# Altium PCB myy.PcbDoc
Units mil, origin at the board's own origin, x right, y up, seen from the top; angles counter-clockwise.
Board outline 3655 x 3985 mil, 2 copper layers (Top Layer, Bottom Layer); 77 components, 66 nets, 230 pads, 10 vias.
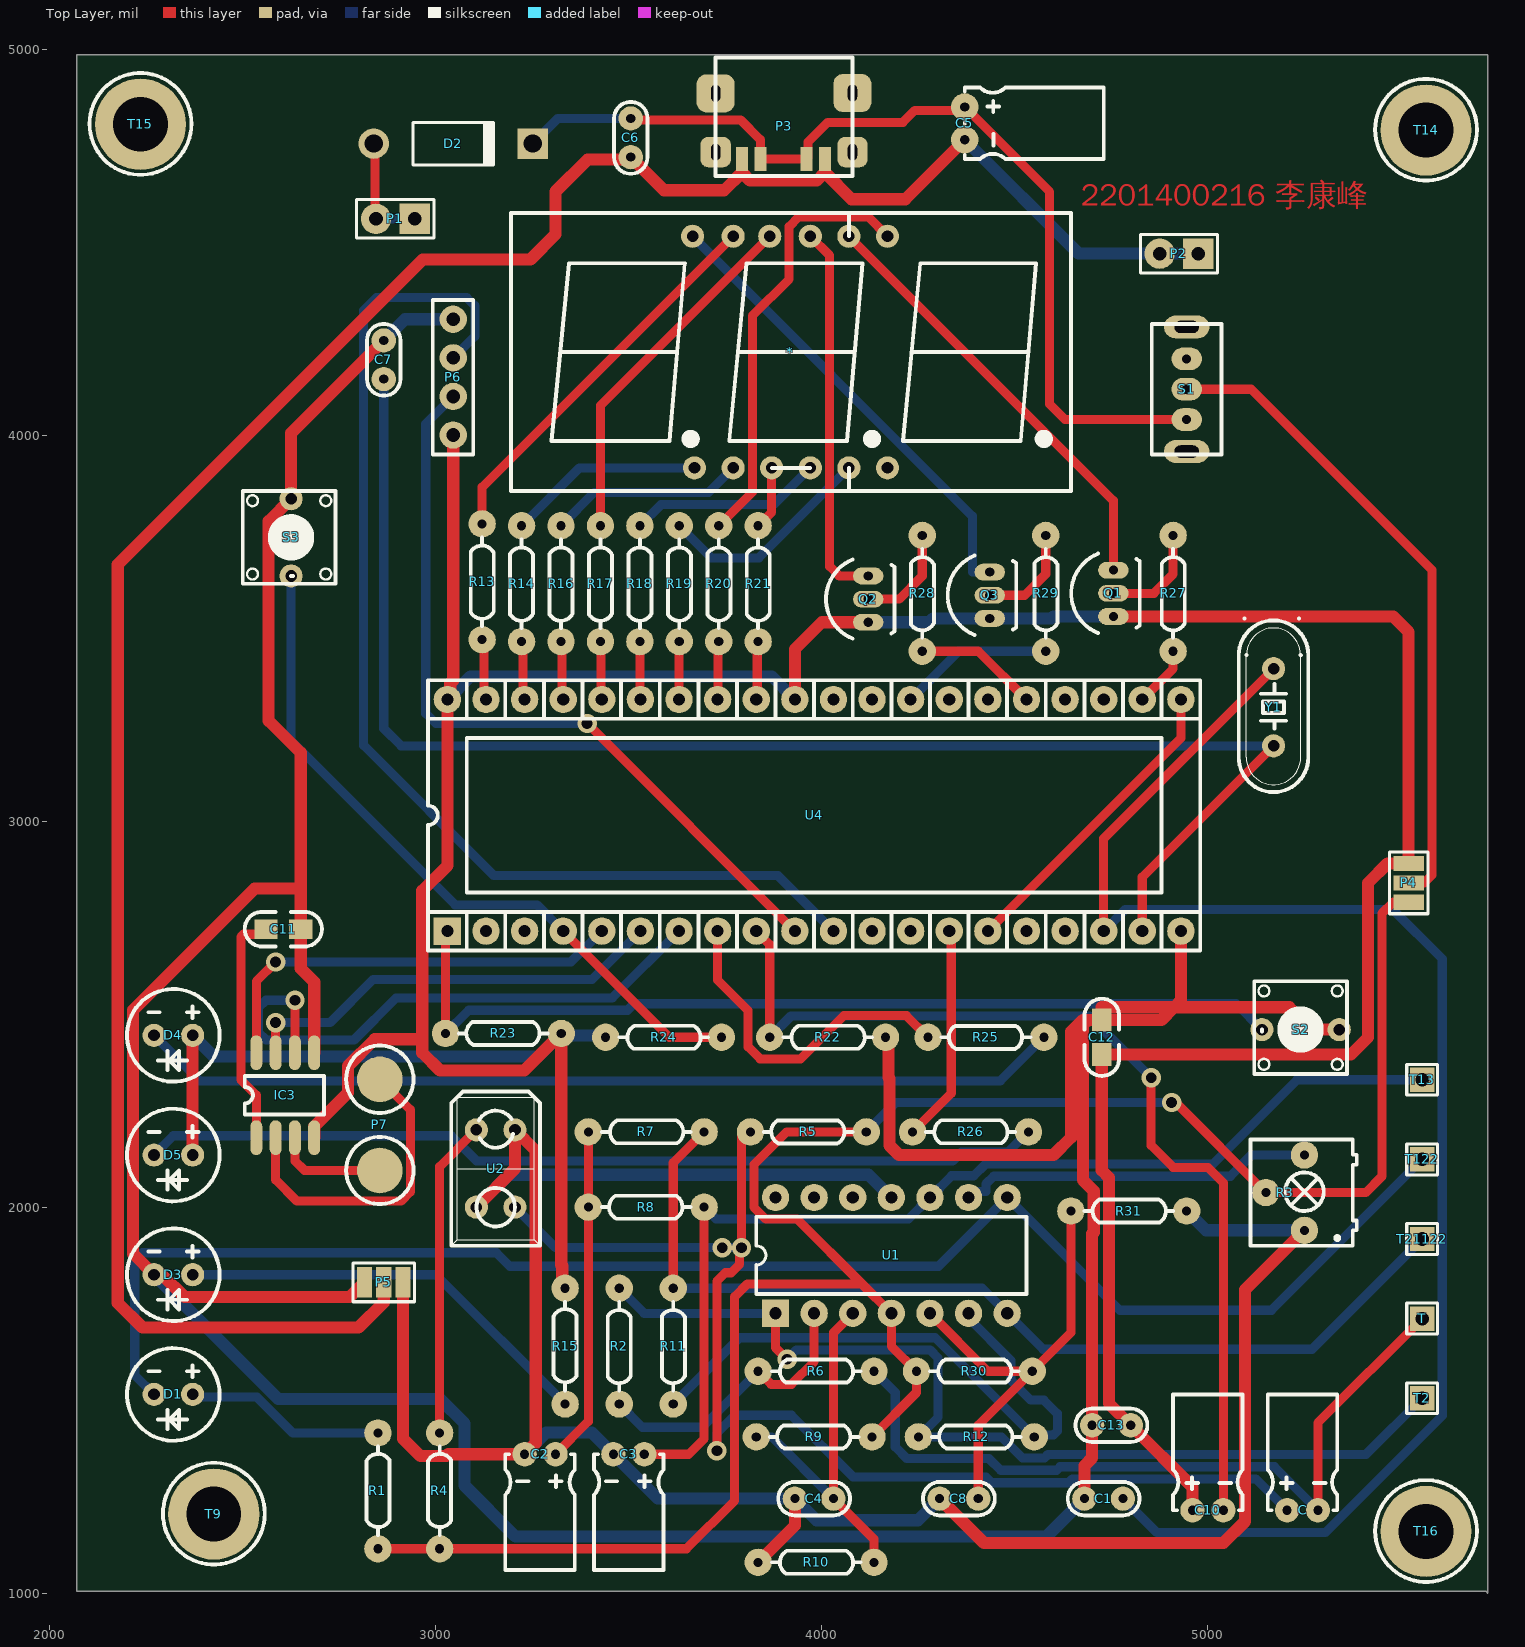
[diagram p0: Top Layer view]
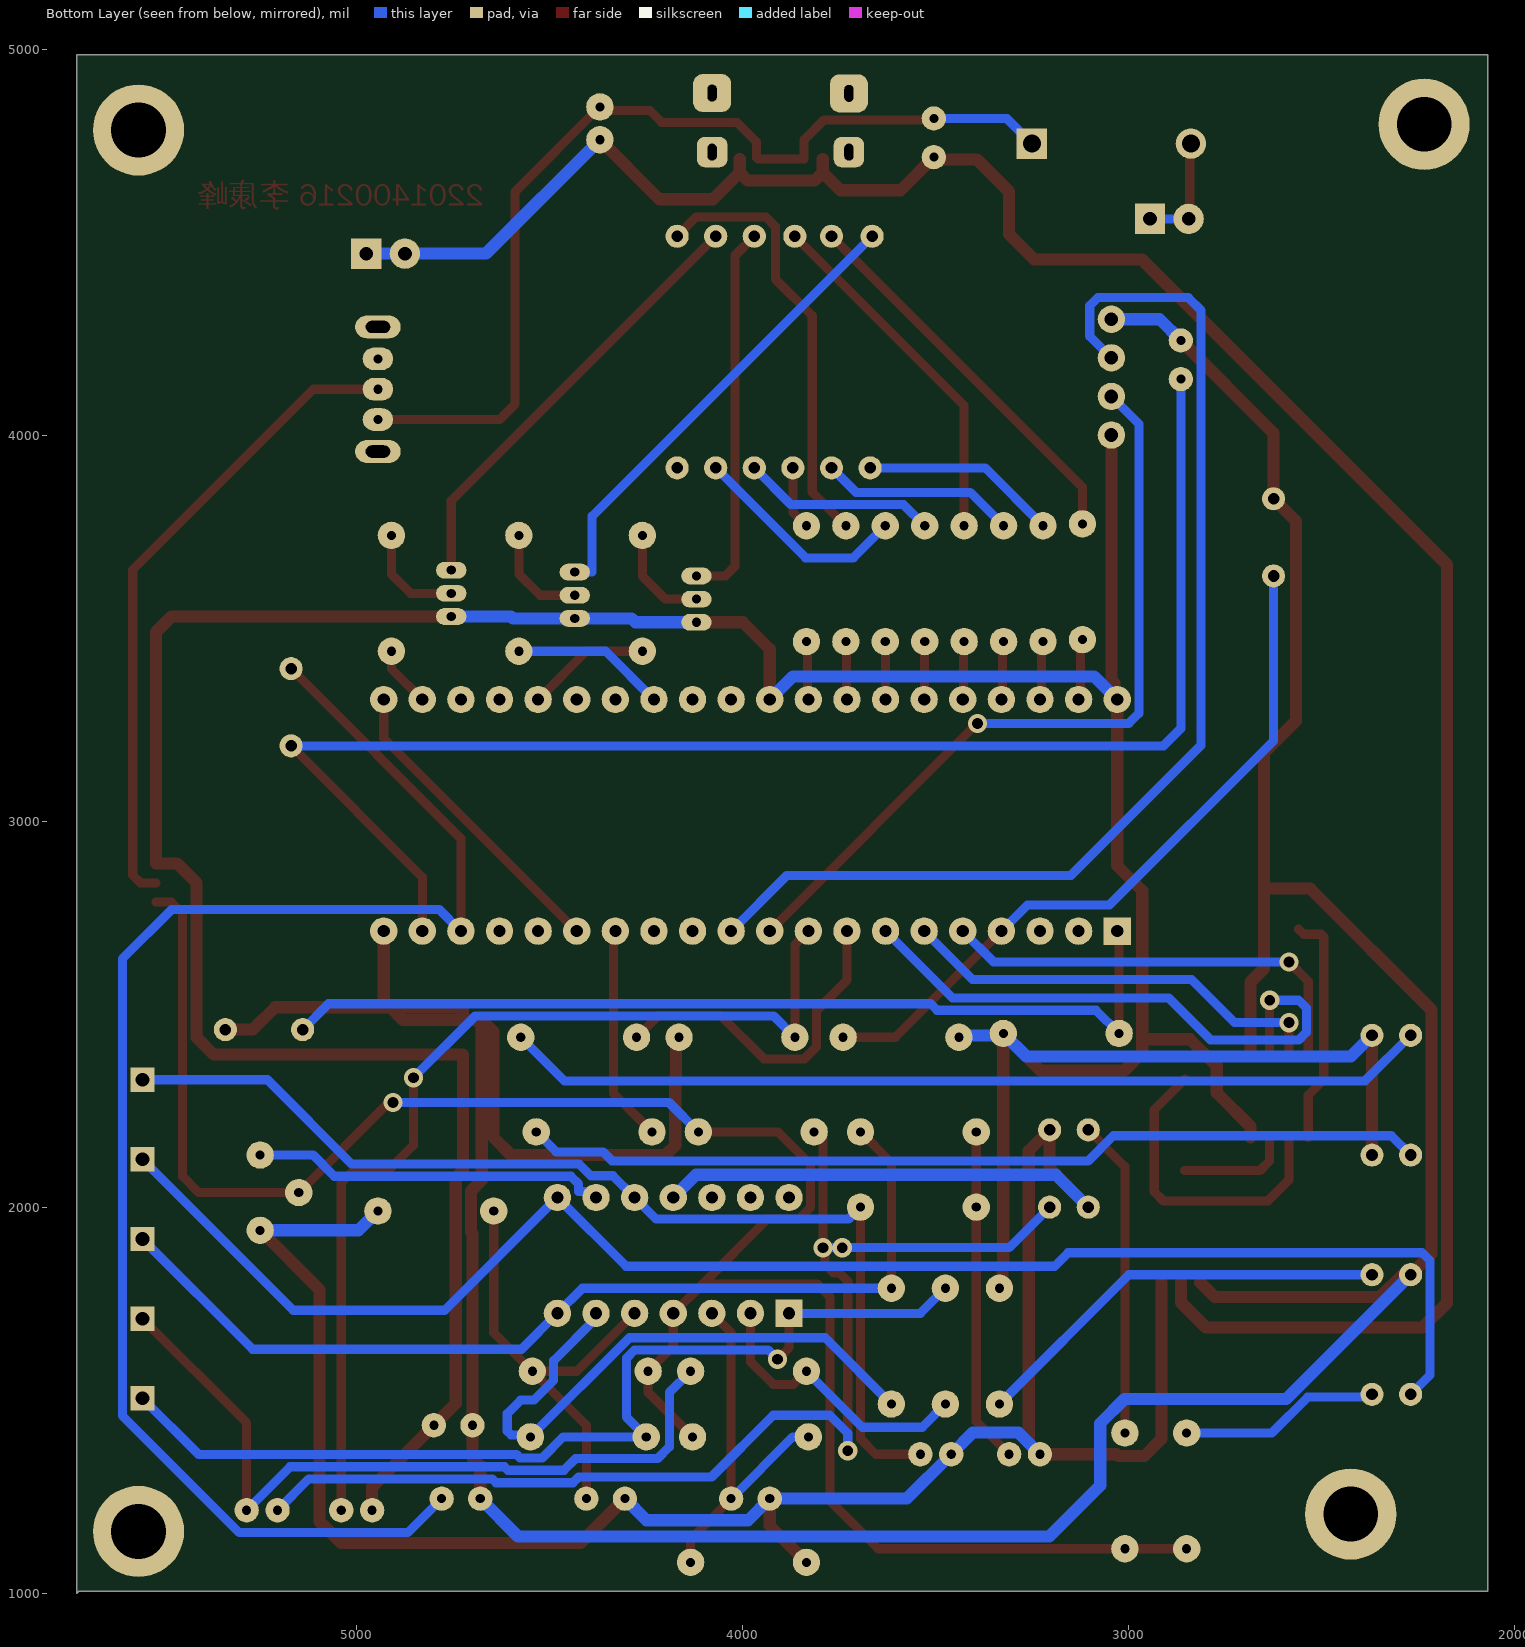
[diagram p1: Bottom Layer view, seen from below]

## Layer stack, top to bottom
Top Solder: solder mask 0.4, Solder Resist, Dk 3.5
Top Layer: signal copper 1.4
Dielectric 1: dielectric 12.6, FR-4, Dk 4.8
Bottom Layer: signal copper 1.4
Bottom Solder: solder mask 0.4, Solder Resist, Dk 3.5

## Board outline
2070,1005 2070,4985 5725,4985 5725,1000 5720,1005

## Design rules (kind name [scope] priority, off if disabled: settings)
Clearance [All] p1: gap=7.87 ignorepadtopadclearanceinfootprint=TRUE
HoleSize [All] p1: absolutevalues=TRUE maxlimit=300 minlimit=1 maxpercent=80.000 minpercent=20.000
HoleToHoleClearance [All] p1: gap=0.79 allowstackedmicrovias=TRUE
MinimumSolderMaskSliver [All] p1: minsoldermaskwidth=0.79
PolygonConnect [All] p1: connectstyle=Relief reliefconductorwidth=10 reliefentries=4 polygonreliefangle="90 Angle" airgapwidth=10
RoutingVias [All] p1: holewidth=28 width=50 viastyle="Through Hole" minholewidth=28 minwidth=50 maxholewidth=28 maxwidth=50
SilkToSilkClearance [All] p1: silktosilkclearance=0.79
SilkToSolderMaskClearance [IsPad] p1: minsilkscreentomaskgap=0 clearancetoexposedcopper=TRUE
SolderMaskExpansion [All] p1: expansion=4
Width dgnd [InNet('DGND')] p1: maxlimit=31.5 minlimit=10 preferedwidth=31.5
Width agnd [InNet('AGND')] p2: maxlimit=31.5 minlimit=10 preferedwidth=31.5
Width gnd [InNet('GND')] p3: maxlimit=31.5 minlimit=10 preferedwidth=31.5
Width 5d [InNet('+5VD')] p4: maxlimit=31.5 minlimit=10 preferedwidth=31.5
Width 51 [InNet('+5V1')] p5: maxlimit=23.62 minlimit=10 preferedwidth=23.62
Width 5 [InNet('+5V')] p6: maxlimit=23.62 minlimit=10 preferedwidth=23.62
Width 5a [InNet('+5VA')] p7: maxlimit=23.62 minlimit=10 preferedwidth=23.62
Width 5.7V [InNet('+5.7V')] p8: maxlimit=23.62 minlimit=10 preferedwidth=23.62
Width [All] p9: maxlimit=23.62 minlimit=10 preferedwidth=23.62
25 further rules are at their usual default settings.

## Components (designator, comment, footprint, x,y, rotation, side; value= is the part's Value field where it differs from the comment)
* "tt" smg 3915,3975 r0 top
C "Cap Pol1" cd-0.1t 5205,1215 r90 top value=10uF
C1 "Cap" C-0.1 4680,1245 r0 top value=30pF
C2 "Cap Pol1" cd-0.1t 3310,1360 r270 top value=0.47uF
C3 "Cap Pol1" cd-0.1t 3540,1360 r270 top value=0.47uF
C4 "Cap" C-0.1 3930,1245 r0 top value=104
C5 "Cap Pol1" CD-0.2T 4370,4850 r0 top value=100uF
C6 "Cap" C-0.1 3505,4820 r270 top value=104
C7 "Cap" C-0.1 2865,4145 r90 top value=30pF
C8 "Cap" C-0.1 4305,1245 r0 top value=100pF
C10 "Cap Pol1" cd-0.1t 4960,1215 r90 top value=100pF
C11 "Cap" C0805R 2560,2720 r0 top value=100pF
C12 "Cap" C0805R 4725,2485 r270 top value=100pF
C13 "Cap" C-0.1 4800,1435 r180 top value=104
D1 "LED0" led5 2335,1520 r180 top
D2 "Diode 1N4007" DO-41 3045,4755 r0 top
D3 "LED0" led5 2335,1830 r180 top
D4 "LED0" led5 2335,2450 r180 top
D5 "LED0" led5 2335,2140 r180 top
IC3 "NY3P065" sop8 2625,2310 r90 top
P1 "Header 2" SIP2 2945,4560 r180 top
P2 "Header 2" SIP2 4975,4470 r180 top
P3 "Header 6" USBTYPEC6 3724.89,4733 r0 top
P4 "Header 3" JUMP3 5520,2790 r270 top
P5 "Header 3" JUMP3 2915,1805 r0 top
P6 "Header 4" SIP4 3045,4000 r90 top
P7 "Header 2" BEEP2 2855,2331.22 r270 top
Q1 "2N3906" TO92C 4755,3530 r90 top
Q2 "2N3906" TO92C 4120,3515 r90 top
Q3 "2N3906" TO92C 4435,3525 r90 top
R1 "Res2" R-0.3 2850,1415 r270 top value=1K
R2 "Res2" R-0.3 3475,1490 r90 top value=300K
R3 "RPot" 3362P 5250,1940 r90 top value=10K
R4 "Res2" R-0.3 3010,1415 r270 top value=2K
R5 "Res2" R-0.3 3815,2195 r0 top value=30K
R6 "Res2" R-0.3 4135,1575 r180 top value=3K
R7 "Res2" R-0.3 3695,2195 r180 top value=3K
R8 "Res2" R-0.3 3395,2000 r0 top value=30K
R9 "Res2" R-0.3 3830,1405 r0 top value=180K
R10 "Res2" R-0.3 4135,1080 r180 top value=100K
R11 "Res2" R-0.3 3615,1490 r90 top value=300K
R12 "Res2" R-0.3 4250,1405 r0 top value=3K
R13 "" R-0.3 3120,3470 r90 top value=100
R14 "" R-0.3 3222.14,3465 r90 top value=100
R15 "Res2" R-0.3 3335,1790 r270 top value=1K
R16 "" R-0.3 3324.29,3465 r90 top value=100
R17 "" R-0.3 3426.43,3465 r90 top value=100
R18 "" R-0.3 3528.57,3465 r90 top value=100
R19 "" R-0.3 3630.71,3465 r90 top value=100
R20 "" R-0.3 3732.86,3465 r90 top value=100
R21 "" R-0.3 3835,3465 r90 top value=100
R22 "Res2" R-0.3 4165,2440 r180 top value=10K
R23 "Res2" R-0.3 3025,2450 r0 top value=10K
R24 "Res2" R-0.3 3740,2440 r180 top value=10K
R25 "Res2" R-0.3 4275,2440 r0 top value=1K
R26 "Res2" R-0.3 4535,2195 r180 top value=1K
R27 "" R-0.3 4910,3440 r90 top value=4.7K
R28 "" R-0.3 4260,3440 r90 top value=4.7K
R29 "" R-0.3 4580,3440 r90 top value=4.7K
R30 "Res2" R-0.3 4545,1575 r180 top value=180K
R31 "Res2" R-0.3 4945,1990 r180 top value=100K
S1 "SW-SPST" POW3 4945,4040 r90 top
S2 "SW-PB" key 5285,2475 r0 top
S3 "SW-PB" key 2610,3780 r90 top
T "TEST" SIP1 5555,1711.25 r0 top
T2 "TEST" SIP1 5555,1505 r270 top
T9 "TEST" HLS 2425,1205 r0 top
T13 "TEST" SIP1 5555,2330 r90 top
T14 "TEST" HLS 5565,4790 r0 top
T15 "TEST" HLS 2235,4805 r0 top
T16 "TEST" HLS 5565,1160 r0 top
T122 "TEST" SIP1 5555,2123.75 r180 top
T21122 "TEST" SIP1 5555,1917.5 r0 top
U1 "LM324M" DIP14MY 3880,1725 r0 top
U2 "Optoisolator1" sen 3165,2170 r270 top
U4 "P89C51RC2BN/01" DIP40 3030,2715 r90 top
Y1 "XTAL" jz 5180,3300 r90 top

## Footprints (in the part's own frame and the unit in brackets; to place one, negate y for a bottom-side part, rotate by r counter-clockwise, add the part's x,y. Pads: shape width x height; smd on the part's side, far side on the other; paste and mask are expansions set on the pad)
3362P [mm]
  round 1.8 hole 0.6: 1(0,0) 2(2.484,2.54) 3(4.953,0)
  silkscreen extent -1.02,-3.44 5.98,3.56
BEEP2 [mm]
  round 3 smd: 1(0,0) 2(6,0)
  silkscreen extent -2.21,-2.22 8.21,2.22
C0805R [mil]
  rect 60x50 smd: 1(0,0) 2(90,0)
  silkscreen extent -55,-45 145,45
C-0.1 [mm]
  round 1.6 hole 0.6: 1(0,0) 2(2.54,0)
  silkscreen extent -1.09,-1.1 3.63,1.1
cd-0.1t [mm]
  round 1.6 hole 0.6: 1(0,0) 2(0,-2.032)
  silkscreen extent 0,-3.3 7.62,1.27
CD-0.2T [mm]
  round 1.8 hole 0.6: 1(0,0) 2(0,-2.159)
  silkscreen extent 0,-3.43 9.14,1.27
DIP14MY [mm]
  rect 1.8x1.8 hole 0.8: 1(0,0)
  round 1.8 hole 0.8: 2(2.54,0) 3(5.08,0) 4(7.62,0) 5(10.16,0) 6(12.7,0) 7(15.24,0) 8(15.24,7.62) 9(12.7,7.62) 10(10.16,7.62) 11(7.62,7.62) 12(5.08,7.62) 13(2.54,7.62) 14(0,7.62)
  silkscreen extent -1.27,1.27 16.51,6.35
DIP40 [mm]
  rect 1.8x1.8 hole 0.8: 1(0,0)
  round 1.8 hole 0.8: 2(0,-2.54) 3(0,-5.08) 4(0,-7.62) 5(0,-10.16) 6(0,-12.7) 7(0,-15.24) 8(0,-17.78) 9(0,-20.32) 10(0,-22.86) 11(0,-25.4) 12(0,-27.94) 13(0,-30.48) 14(0,-33.02) 15(0,-35.56) 16(0,-38.1) 17(0,-40.64) 18(0,-43.18) 19(0,-45.72) 20(0,-48.26) 21(15.24,-48.26) 22(15.24,-45.72) 23(15.24,-43.18) 24(15.24,-40.64) 25(15.24,-38.1) 26(15.24,-35.56) 27(15.24,-33.02) 28(15.24,-30.48) 29(15.24,-27.94) 30(15.24,-25.4) 31(15.24,-22.86) 32(15.24,-20.32) 33(15.24,-17.78) 34(15.24,-15.24) 35(15.24,-12.7) 36(15.24,-10.16) 37(15.24,-7.62) 38(15.24,-5.08) 39(15.24,-2.54) 40(15.24,0)
  silkscreen extent -1.27,-49.53 16.51,1.27
DO-41 [mm] "Diode, Axial; Body 5.2 x 2.7 mm (LxDia. max), Lead Dia. 0.86 mm (max)"
  round 2 hole 1.2: 1(-5.23,0)
  rect 2x2 hole 1.2: 2(5.23,0)
  silkscreen extent -2.65,-1.4 2.75,1.4
HLS [mm]
  round 6 hole 3.6: 1(0,0)
  silkscreen extent -3.35,-3.32 3.35,3.37
JUMP3 [mm]
  rect 1x2 smd: 1(0,0) 2(-1.27,0) 3(-2.54,0)
  silkscreen extent -3.3,-1.27 0.76,1.27
jz [mil]
  round 60 hole 30: 1(-105,10) 2(95,10)
  silkscreen extent -225,-80 225,100
key [mil]
  round 60 hole 30: 1(-145,-15) 2(55,-15)
  silkscreen extent -165,-130 75,110
led5 [mil]
  round 60 hole 30: 1(-35,5) 2(65,5)
  silkscreen extent -105,-115 135,125
POW3 [mm]
  oval 1.5x3 hole 0.8 slot 1.6 at 90 deg: 0(-2.1,0) 0(6.1,0)
  oval 1.5x2 hole 0.6: 1(0,0) 2(2,0) 3(4,0)
  silkscreen extent -2.3,-2.3 6.3,2.3
R-0.3 [mm]
  round 1.8 hole 0.6: 1(0,0) 2(7.62,0)
  silkscreen extent 0.89,-0.76 6.73,0.75
sen [mil]
  round 60 hole 30: 1(-30,-60) 2(-30,40) 3(170,-60) 4(170,40)
  silkscreen extent -130,-125 270,105
SIP1 [mm]
  rect 1.6x1.6 hole 0.9: 1(0,0)
  silkscreen extent -1.02,-1.02 1.02,1.02
SIP2 [mm] "Connector; Header; 2 Position"
  rect 2x2 hole 0.9: 1(0,0)
  round 2 hole 0.9: 2(2.54,0)
  silkscreen extent -1.27,-1.27 3.81,1.27
SIP4 [mm]
  round 1.8 hole 0.9: 1(0,0) 2(2.54,0) 3(5.08,0) 4(7.62,0)
  silkscreen extent -1.27,-1.32 8.89,1.35
smg [mil]
  round 60 hole 30: 1(-245,-60) 2(-145,-60) 3(-45,-60) 4(55,-60) 5(155,-60) 6(255,-60) 7(255,540) 8(155,540) 9(55,540) 10(-50,540) 11(-145,540) 12(-250,540)
  silkscreen extent -720,-120 730,600
sop8 [mil]
  rrect100% 90x31 smd: 1(-130,90) 2(-130,40) 3(-130,-10) 4(-130,-60) 5(90,-60) 6(90,-10) 7(90,40) 8(90,90)
  silkscreen extent -70,-85 30,120
TO92C [mm]
  oval 1.1x2 hole 0.6: 1(0,0) 2(1.524,0) 3(3.048,0)
  silkscreen extent -1.09,-1.74 4.13,2.77
USBTYPEC6 [mm]
  rrect50% 2x2 hole 0.6 slot 1.1 at 90 deg: 0(0,0) 0(9,0)
  rrect50% 2.5x2.5 hole 0.6 slot 1.1 at 90 deg: 0(0,3.861) 0(9,3.886)
  rect 0.8x1.6 smd: 1(1.727,-0.457) 2(2.946,-0.457) 5(5.972,-0.457) 6(7.188,-0.457)
  silkscreen extent 0,-1.57 9,6.22

## Part data
C C2 C3 C5 C10: "Polarized Capacitor (Radial)", LatestRevisionDate=17-Jul-2002, LatestRevisionNote="Re-released for DXP Platform.", PackageDescription="Polarized Capacitor (Radial); 2 Leads", PackageReference=RB7.6-15, Published=8-Jun-2000, Publisher="Altium Limited"
C1 C4 C6 C7 C8 C11 C12 C13: "Capacitor", LatestRevisionDate=17-Jul-2002, LatestRevisionNote="Re-released for DXP Platform.", PackageDescription="Radial Cap, Thru-Hole; 2 Leads; 0.3 in Pin Spacing", PackageReference=RAD-0.3, Published=8-Jun-2000, Publisher="Altium Limited"
D1 D3 D4 D5: "Typical INFRARED GaAs LED", LatestRevisionDate=08-Jul-2005, LatestRevisionNote="Mech Layer 1 removed.", PackageDescription="LED; 2 Leads", PackageReference=LED-0, Published=8-Jun-2000, Publisher="Altium Limited"
D2: "1 Amp General Purpose Rectifier", Code_JEDEC=DO-204-AL, ComponentLink1Description="Manufacturer Link", ComponentLink1URL=http://www.fairchildsemi.com/, ComponentLink2Description=Datasheet, ComponentLink2URL=http://www.fairchildsemi.com/ds/1N%2F1N4001.pdf, DatasheetVersion=1998, LatestRevisionDate=17-Jul-2002, LatestRevisionNote="Re-released for DXP Platform.", PackageDescription="Diode, Axial; Body 5.2 x 2.7 mm (LxDia. max), Lead Dia. 0.86 mm (max)", PackageReference=DO-41, PackageVersion=Aug-1999, Published=8-Jun-2000, Publisher="Altium Limited"
IC3: library part SOUND
P1 P2 P7: "Header, 2-Pin", LatestRevisionDate=17-Jul-2002, LatestRevisionNote="Re-released for DXP Platform.", Publisher="Altium Limited"
P3: "Header, 6-Pin", LatestRevisionDate=17-Jul-2002, LatestRevisionNote="Re-released for DXP Platform.", Publisher="Altium Limited"
P4 P5: "Header, 3-Pin", LatestRevisionDate=17-Jul-2002, LatestRevisionNote="Re-released for DXP Platform.", Publisher="Altium Limited"
P6: "Header, 4-Pin", LatestRevisionDate=17-Jul-2002, LatestRevisionNote="Re-released for DXP Platform.", Publisher="Altium Limited"
Q1 Q2 Q3: "PNP General Purpose Amplifier", ComponentLink1Description="Manufacturer Link", ComponentLink1URL=http://www.fairchildsemi.com/, ComponentLink2Description=Datasheet, ComponentLink2URL=http://www.fairchildsemi.com/ds/2N%2F2N3906.pdf, DatasheetVersion=1997, LatestRevisionDate=15-Jan-2003, LatestRevisionNote="PCB Footprint 'BCY-W3/D4.7' replaced", PackageDescription="TO, Flat Index; 3 In-Line, Axial Leads; Body Dia. 4.5mm; Leads 0.51 x 0.48 mm (max)", PackageReference=TO-92A, PackageVersion=Sep-1998, Published=8-Jun-2000, Publisher="Altium Limited"
R1 R2 R4 R5 R6 R7 R8 R9 R10 R11 R12 R15 R22 R23 R24 R25 R26 R30 R31: "Resistor", LatestRevisionDate=17-Jul-2002, LatestRevisionNote="Re-released for DXP Platform.", PackageDescription="Axial Device, Thru-Hole; 2 Leads; 0.4 in Pin Spacing", PackageReference=AXIAL-0.4, Published=8-Jun-2000, Publisher="Altium Limited"
R3: "Potentiometer", LatestRevisionDate=17-Jul-2002, LatestRevisionNote="Re-released for DXP Platform.", PackageDescription="Variable Resistor, Thru-Hole; 3 Leads", PackageReference=VR5, Published=8-Jun-2000, Publisher="Altium Limited", Set Position=0.5, Sim Note="Enter the Resistance value and the set point into parameter fields."
R13 R14 R16 R17 R18 R19 R20 R21 R27 R28 R29: library part Res2, "Resistor", LatestRevisionDate=17-Jul-2002, LatestRevisionNote="Re-released for DXP Platform.", PackageDescription="Axial Device, Thru-Hole; 2 Leads; 0.4 in Pin Spacing", PackageReference=AXIAL-0.4, Published=8-Jun-2000, Publisher="Altium Limited"
S1: "Single-Pole, Single-Throw Switch", LatestRevisionDate=17-Jul-2002, LatestRevisionNote="Re-released for DXP Platform.", PackageDescription="Switch; 2 Leads", PackageReference=SPST-2, Published=24-Mar-1999, Publisher="Altium Limited"
S2 S3: "Switch", LatestRevisionDate=17-Jul-2002, LatestRevisionNote="Re-released for DXP Platform.", PackageDescription="Switch; 2 Leads", PackageReference=SPST-2, Published=24-Mar-1999, Publisher="Altium Limited"
U1: "Low Power Quad Operational Amplifier", DigiKeyPartNumber=LM324MXCT-ND, Manufacturer="National Semiconductor", PackageTopMarking=NSUZXYTT*LM324M, Code_IPC=SOIC127P600-14, Code_JEDEC=MS-012AB, ComponentLink1Description="LM324 Datasheet", ComponentLink1URL=http://www.national.com/ds/LM/LM324.pdf, ComponentLink2Description="LM324 Web Page", ComponentLink2URL=http://www.national.com/pf/LM/LM324.html, ComponentLink3Description="M14A Package Page", ComponentLink3URL=http://www.national.com/packaging/folders/m14a.html, CompType=Amplifiers, DatasheetVersion=Aug-2000, LatestRevisionDate=13-Jan-2009, LatestRevisionNote="Sim Model Added.", PackageDescription="Molded Package S.O., .150in Wide, 14 Lead", PackageReference=M14A, PackageVersion="revJ, Jan-1996", PartNumber=LM324M, PinCount=14, Published=4-Dec-2008, Publisher="Altium Limited", RoHS=O
U2: "4-Pin Phototransistor Optocoupler", DatasheetVersion=Nov-2003, LatestRevisionDate=04-Mar-2005, LatestRevisionNote="Sch pins 3 & 4 Swapped.", PackageReference=DIP-4, Published=24-Mar-1999, Publisher="Altium Limited"
U4: "80C51 8-Bit Flash Microcontroller Family, 32 kB ISP/IAP Flash with 512 B RAM.", Code_JEDEC=MO-015, ComponentLink1Description="Manufacturer Link", ComponentLink1URL=http://www-us2.semiconductors.philips.com/, ComponentLink2Description=Datasheet, ComponentLink2URL=http://www.semiconductors.philips.com/acrobat/datasheets/P89C51RA2_RB2_RC2_RD2_2.pdf, DatasheetVersion=18-Jul-2002, PackageDescription="DIP, Plastic; 40 Leads; Row Spacing 15.24 mm; Pitch 2.54 mm", PackageReference=SOT129-1, PackageVersion=Aug-2000, Published=21-May-2003, Publisher="Altium Limited"
Y1: "Crystal Oscillator", LatestRevisionDate=17-Jul-2002, LatestRevisionNote="Re-released for DXP Platform.", PackageDescription="Crystal, Thru-Hole; 2 Leads; Body 3.1 x 8.2 mm (Dia.xH)", PackageReference=R38, Published=8-Jun-2000, Publisher="Altium Limited"

## Via types
v1: diameter 50, hole 28, Top Layer to Bottom Layer, 10 vias

## Nets (pads, with @x,y where several pads share a name; then routed paths per layer and width w, separated by ;. In a path a pad name is that pad's centre, name@x,y a point inside that pad or via, vN(x,y) a via of type N, cw(c..) or ccw(c..) an arc to the next point about the centre after c; other vN are vias at no path point)
+5.7V: D2.1 P1.1 P1.2 | length 297.4
  Top Layer w23.62: D2.1 2842.05,4752.05 2842.05,4562.95 P1.2
  Bottom Layer w23.62: P1.2 P1.1
+5V: P4.2 S1.2 | length 1687.9
  Top Layer w23.62: S1.2 5112,4118.74 5580,3650.74 5580,2860 5560,2840 P4.2
+5V1: C5.1 C6.1 D2.2 P3.2 P3.5 S1.1 | length 2530.7
  Top Layer w23.62: C6.1 3508.9,4816.1 3789.69,4816.1 3840.89,4764.9 P3.2 P3.5 3963.94,4718.94 3963.94,4758.8 4015.14,4810 4210,4810 4240.96,4840.96 4360.96,4840.96 C5.1 4590,4630 4590,4080 4630,4040 S1.1
  Bottom Layer w23.62: D2.2 3315.91,4820 C6.1
+5VA: P4.1 R1.2 R3.2 R4.2 R5.2 R9.2 R30.2 U1.4 | length 5391.7
  Top Layer w23.62: R1.2 R4.2 3649,1115 3774,1240 3774,1768 3807,1801 4104,1801 ; R5.2 3909,2195 3824,2110 3824,2000 3855,1969 3936,1969 4104,1801 ; R9.2 4245,1520 R30.2 4180,1640 U1.4 4104,1801 ; v1(4906,2271) 4916.8,2271 R3.2 5408.8,2037.8 5451,2080 5451,2761 5480,2790 P4.1
  Bottom Layer w23.62: R5.2 4191,2271 v1(4906,2271)
+5VD: C10.1 C12.2 C13.1 D4.1 D5.1 IC3.4 P4.3 P6.1 Q1.1 Q2.1 Q3.1 R15.1 R23.2 R24.2 U4.31 U4.40 | length 10424.2
  Top Layer w31.5: D5.1 D4.1 ; IC3.4 2685,2209 2772.32,2296.33 2772.32,2365.47 2841.86,2435 2965,2435 ; P6.1 3045,3365 3037.53,3357.53 3037.53,3322.53 U4.40 3030,2884.67 2965,2819.67 2965,2435 ; R15.1 3327.47,1797.53 3327.47,1847.53 3325,1850 R23.2 3229,2354 3011,2354 2965,2400 2965,2435 ; U4.31 3930,3445 4000,3515 Q2.1 ; Q1.1 5480,3530 5520,3490 P4.3 5465,2890 5415,2840 5415,2440 5370,2395 C12.2 4725,2095.43 4743.43,2077 4743.43,1491.57 C13.1 4960,1275 C10.1
  Bottom Layer w31.5: D4.1 2425,2390 3265,2390 R23.2 3330,2445 3435,2445 R24.2 ; U4.40 3090,3375 3870,3375 U4.31 ; Q2.1 4278,3515 4288,3525 Q3.1 4595,3525 4600,3530 Q1.1
AGND: C2.2 C3.2 C4.1 C8.1 P5.1 R3.1 R10.2 R31.1 U1.11 U2.2 U2.3 | length 6415.9
  Top Layer w31.5: P5.1 2915,1400 2960,1355 3027,1355 3032,1360 C2.2 3259,1389 3259,2146 U2.2 3205,2100 U2.3 ; R10.2 3930,1175 C4.1 ; C8.1 4420,1130 5040,1130 5096,1186 5096,1786 R3.1
  Bottom Layer w31.5: U2.3 3189.06,2084.06 4120.94,2084.06 U1.11 ; C2.2 3286,1416 3404,1416 C3.2 3575,1245 C4.1 3986,1189 4249,1189 C8.1 ; R31.1 4995,1940 R3.1
DGND: C1.1 C7.2 C11.2 C12.1 C13.2 D3.2 IC3.5 P5.3 P6.4 R22.1 S2.2 S3.2 U4.20 | length 10400.2
  Top Layer w31.5: IC3.5 2685,2583 2650,2618 C11.2 2650,2820 ; P5.3 2777,1767 2349,1767 2291,1825 D3.2 2216,1879 2216,2511 2530,2825 2645,2825 2650,2820 ; C7.2 2625,4005 S3.2 2567,3777 2567,3260 2650,3177 2650,2820 ; R22.1 4172.53,2432.47 4172.53,2335.47 4175,2333 4175,2160 4200,2135 4600,2135 4646,2181 4646,2455 4676,2485 4690,2485 ; C1.1 4680,1330 4700,1350 C13.2 4700,1931 4704.06,1935.06 4704.06,2042 4676,2070.06 4676,2471 4690,2485 ; U4.20 4930,2535 4913,2518 ; S2.2 5269,2460 5211,2518 4913,2518 ; 4690,2485 C12.1 ; C12.1 4880,2485 4913,2518 ; C12.1 4725,2518 4913,2518
  Bottom Layer w31.5: D3.2 2592,1503 3011,1503 3074,1440 3074,1279 3206,1147 4582,1147 C1.1 ; C7.2 2920,4300 P6.4
GND: C5.2 C6.2 P2.1 P2.2 P3.1 P3.6 P5.2 | length 6364.9
  Top Layer w31.5: P5.2 2865,1753 2800,1688 2240,1688 2176,1752 2176,3665 2966,4455 3245,4455 3310,4520 3310,4630.71 3393.26,4713.97 3498.97,4713.97 C6.2 3591,4634 3746.89,4634 3792.89,4680 ; P3.1 3792.89,4680 ; P3.6 4007.89,4680 ; C5.2 4216,4611 4076.89,4611 4007.89,4680 ; 3792.89,4680 3813.89,4659 3986.89,4659 4007.89,4680
  Bottom Layer w31.5: C5.2 4665,4470 P2.2 P2.1
Net*_1: *.1 R14.2 | length 510
  Bottom Layer w23.62: R14.2 3372.14,3915 *.1
Net*_2: *.2 R16.2 | length 507.8
  Bottom Layer w23.62: R16.2 3410.9,3851.61 3706.61,3851.61 *.2
Net*_3: *.3 R21.2 | length 164.5
  Top Layer w23.62: R21.2 3870,3800 *.3
Net*_4: *.4 R18.2 | length 503.6
  Bottom Layer w23.62: R18.2 3583.69,3820.12 3875.12,3820.12 *.4
Net*_5: *.5 R19.2 | length 570.2
  Bottom Layer w23.62: R19.2 3713.71,3682 3837,3682 *.5
Net*_7: *.7 R20.2 | length 1136.5
  Top Layer w23.62: R20.2 3820,3852.14 3820,4309 3915,4404 3915,4540 3940,4565 4120,4565 *.7
Net*_8: *.8 Q1.3 | length 1148.7
  Top Layer w23.62: *.8 4755,3830 Q1.3
Net*_9: *.9 Q2.3 | length 986.1
  Top Layer w23.62: *.9 4020,4465 4020,3660 4045,3635 Q2.3
Net*_10: *.10 R17.2 | length 931.7
  Top Layer w23.62: R17.2 3426.43,4076.43 *.10
Net*_11: *.11 R13.2 | length 1014.2
  Top Layer w23.62: R13.2 3120,3865 *.11
Net*_12: *.12 Q3.3 | length 1215.3
  Bottom Layer w23.62: *.12 4390,3790 4390,3645 Q3.3
NetC1_2: C1.2 U4.18 Y1.2 | length 3987.4
  Top Layer w23.62: U4.18 4730,2955 Y1.2
  Bottom Layer w23.62: U4.18 4786,2771 5479,2771 5607,2643 5607,1460 5304,1157 4868,1157 C1.2
NetC2_1: C2.1 R7.2 R8.1 | length 870.2
  Top Layer w23.62: C2.1 3395,1445 R8.1 R7.2
NetC3_1: C3.1 R8.2 T13.1 U1.10 | length 2793.9
  Top Layer w23.62: C3.1 3655,1360 3695,1400 R8.2
  Bottom Layer w23.62: R8.2 3726,1969 4224,1969 U1.10 4336.25,2081.25 4393.39,2081.25 4423.75,2111.61 5012.61,2111.61 5231,2330 T13.1
NetC4_2: C4.2 R9.1 R10.1 U1.3 | length 975.5
  Top Layer w23.62: U1.3 4030,1675 C4.2 4135,1140 R10.1
  Bottom Layer w23.62: R9.1 3870,1405 C4.2
NetC7_1: C7.1 U4.19 Y1.1 | length 3849.5
  Top Layer w23.62: U4.19 4830,2855 Y1.1
  Bottom Layer w23.62: C7.1 2865,3240 2910,3195 Y1.1
NetC8_2: C8.2 R30.1 R31.2 U1.5 | length 1171.5
  Top Layer w23.62: U1.5 4430,1575 R30.1 ; C8.2 4405,1435 R30.1 ; R31.2 4645,1675 R30.1
NetC10_2: C10.2 R22.2 U4.9 | length 2616.8
  Top Layer w23.62: U4.9 3865,2680 R22.2 ; v1(4853,2335) 4853,2160 4910,2103 5000,2103 5040,2063 C10.2
  Bottom Layer w23.62: R22.2 3920.12,2495.12 4692.88,2495.12 v1(4853,2335)
NetC11_1: C11.1 IC3.1 | length 609.9
  Top Layer w23.62: IC3.1 2535,2290 2495,2330 2495,2700 2501.81,2706.81 2546.81,2706.81 C11.1
NetC_1: C.1 R5.1 U2.4 | length 3166.6
  Top Layer w23.62: v1(3728,1369) 3728,1808 3750,1830 3765,1830 3786.95,1851.95 3786.95,1889.95 v1(3792,1895) 3792,2195 R5.1
  Bottom Layer w23.62: U2.4 3310,1895 v1(3742,1895) v1(3792,1895) ; v1(3728,1369) 3728,1414 3775,1461 3921,1461 4081,1301 4425,1301 4440,1286 4638.82,1286 4649,1296.18 5123.82,1296.18 C.1
NetC_2: C.2 R6.1 T.1 | length 1997.5
  Top Layer w23.62: C.2 5285,1441.25 T.1
  Bottom Layer w23.62: R6.1 4190,1520 4190,1379 4220,1349 4432.77,1349 4463.39,1318.39 4608.03,1318.39 4617.32,1327.68 5172.32,1327.68 C.2
NetD1_1: D1.1 R1.1 | length 521.4
  Bottom Layer w23.62: D1.1 2376.96,1508.04 2536.85,1508.04 2629.89,1415 R1.1
NetD1_2: D1.2 T122.1 U1.8 | length 4082
  Bottom Layer w23.62: D1.2 2220,1565 2220,1862 2240,1882 3157,1882 3192,1847 4302,1847 U1.8 4772,1733 5164.25,1733 T122.1
NetD3_1: D3.1 R15.2 | length 1103.8
  Bottom Layer w23.62: D3.1 3000,1825 R15.2
NetD4_2: D4.2 R25.2 | length 2400.7
  Bottom Layer w23.62: D4.2 2388,2327 4462,2327 R25.2
NetD5_2: D5.2 R26.1 | length 2344.1
  Bottom Layer w23.62: D5.2 2320,2185 3040,2185 3105.51,2119.49 4338.27,2119.49 4361.89,2143.11 4483.11,2143.11 R26.1
NetIC3_2: IC3.2 P7.1 | length 814.7
  Top Layer w23.62: IC3.2 2585,2071 2640,2016 2910,2016 2934,2040 2934,2252.22 P7.1
NetIC3_3: IC3.3 P7.2 | length 290.4
  Top Layer w23.62: IC3.3 2635,2120 2660,2095 P7.2
NetQ1_2: Q1.2 R27.2 | length 275.7
  Top Layer w23.62: Q1.2 4860,3590 4910,3640 R27.2
NetQ2_2: Q2.2 R28.2 | length 269.9
  Top Layer w23.62: Q2.2 4200,3575 4260,3635 R28.2
NetQ3_2: Q3.2 R29.2 | length 267.8
  Top Layer w23.62: Q3.2 4525,3585 4580,3640 R29.2
NetR2_1: R2.1 R6.2 U1.2 | length 753.4
  Top Layer w23.62: R6.2 3869,1541 3921,1541 3980,1600 U1.2
  Bottom Layer w23.62: R2.1 3535,1430 3690,1430 R6.2
NetR2_2: R2.2 R12.1 T2.1 U1.1 | length 2590.4
  Top Layer w23.62: U1.1 3880,1636 v1(3910,1606)
  Bottom Layer w23.62: R2.2 3540,1725 U1.1 ; v1(3910,1606) 3934.12,1630.12 4280,1630.12 4301,1609.12 4301,1456 R12.1 4464.88,1405 4520,1349.88 4576.53,1349.88 4585.83,1359.17 5409.17,1359.17 T2.1
NetR3_3: R3.3 U1.9 | length 936.1
  Bottom Layer w23.62: U1.9 4380,2041 4425,2041 4425,2060 4445.12,2080.12 5058.12,2080.12 5113,2135 R3.3
NetR4_1: R4.1 U2.1 | length 824.4
  Top Layer w23.62: R4.1 3010,2105 U2.1
NetR7_1: R7.1 R11.2 T21122.1 U1.7 | length 2561.8
  Top Layer w23.62: R11.2 3615,2115 R7.1
  Bottom Layer w23.62: R11.2 4415,1790 U1.7 4573,1632 5269.5,1632 T21122.1
NetR11_1: R11.1 R12.2 U1.6 | length 1598.7
  Bottom Layer w23.62: R11.1 3786.61,1661.61 4293.39,1661.61 R12.2 4555,1410 4600,1410 4610,1420 4610,1465 4575,1500 4541.08,1500 4489.88,1551.2 4489.88,1602.33 4380,1712.22 U1.6
NetR13_1: R13.1 U4.39 | length 159.1
  Top Layer w23.62: R13.1 3125,3465 3125,3320 U4.39
NetR14_1: R14.1 U4.38 | length 153.3
  Top Layer w23.62: R14.1 3226.07,3461.07 3226.07,3318.93 U4.38
NetR16_1: R16.1 U4.37 | length 152.4
  Top Layer w23.62: R16.1 3327.14,3462.14 3327.14,3317.86 U4.37
NetR17_1: R17.1 U4.36 | length 151.5
  Top Layer w23.62: R17.1 3428.21,3463.21 3428.21,3316.79 U4.36
NetR18_1: R18.1 U4.35 | length 150.6
  Top Layer w23.62: R18.1 3529.29,3464.29 3529.29,3315.71 U4.35
NetR19_1: R19.1 U4.34 | length 150.3
  Top Layer w23.62: U4.34 3630.36,3315.36 3630.36,3464.64 R19.1
NetR20_1: R20.1 U4.33 | length 151.2
  Top Layer w23.62: U4.33 3731.43,3316.43 3731.43,3463.57 R20.1
NetR21_1: R21.1 U4.32 | length 152.1
  Top Layer w23.62: U4.32 3832.5,3317.5 3832.5,3462.5 R21.1
NetR23_1: R23.1 S2.1 U4.1 | length 2441.7
  Top Layer w23.62: R23.1 3025,2710 U4.1
  Bottom Layer w23.62: R23.1 3085.14,2510.14 3496.53,2510.14 3513.39,2527 5073,2527 S2.1
NetR24_1: R24.1 S3.1 U4.4 | length 1860.1
  Top Layer w23.62: U4.4 3605,2440 R24.1
  Bottom Layer w23.62: S3.1 2625,3208 3050,2783 3262,2783 U4.4
NetR25_1: R25.1 U4.8 | length 881.2
  Top Layer w23.62: U4.8 3730,2588 3809,2509 3809,2415 3840,2384 3945,2384 4057,2496 4219,2496 R25.1
NetR26_2: R26.2 U4.14 | length 563.5
  Top Layer w23.62: R26.2 4335,2295 4335,2710 U4.14
NetR27_1: R27.1 U4.22 | length 158.1
  Top Layer w23.62: U4.22 4910,3395 R27.1
NetR28_1: R28.1 U4.25 | length 321.8
  Top Layer w23.62: R28.1 4405,3440 U4.25
NetR29_1: R29.1 U4.28 | length 401.8
  Bottom Layer w23.62: U4.28 4355,3440 R29.1
P1.4: IC3.8 U4.5 | length 1133.8
  Top Layer w23.62: IC3.8 2535,2585 v1(2585,2635)
  Bottom Layer w23.62: v1(2585,2635) 3350,2635 U4.5
P1.5: IC3.7 U4.6 | length 1121.2
  Top Layer w23.62: IC3.7 v1(2585,2478)
  Bottom Layer w23.62: v1(2585,2478) 2726,2478 2837.99,2589.99 3404.99,2589.99 U4.6
P1.6: IC3.6 U4.7 | length 1517.4
  Top Layer w23.62: IC3.6 v1(2635,2536)
  Bottom Layer w23.62: v1(2635,2536) 2560,2536 2540,2516 2540,2453 2560,2433 2788,2433 2897,2542 3457,2542 U4.7
P30: P6.2 U4.10 | length 2040
  Top Layer w23.62: v1(3392,3253) U4.10
  Bottom Layer w23.62: P6.2 2974,4029 2974,3279 3000,3253 v1(3392,3253)
P31: P6.3 U4.11 | length 3011.8
  Bottom Layer w23.62: P6.3 3101,4256 3101,4335 3080,4356 2846,4356 2813,4323 2813,3196 3150,2859 3886,2859 U4.11
SIGNAL: U4.15 U4.21 | length 807.1
  Top Layer w23.62: U4.15 4930,3215 U4.21
pads on no net: *.6 P3.0 S1.0 S1.3 T9.1 T14.1 T15.1 T16.1 U1.12 U1.13 U1.14 U4.2 U4.3 U4.12 U4.13 U4.16 U4.17 U4.23 U4.24 U4.26 U4.27 U4.29 U4.30

## Other copper
Top Layer:
  text "2201400216 李康峰" at 4670,4575 h100

## Silkscreen, mask and mechanical layers (free items; w line width, h text height)
Mechanical 1:
  lines w10: 5165,4990 5167.5,4987.5 ; 5720,3170 5725,3175